# EAGLE board Integration board (EAGLE 9.3.0)
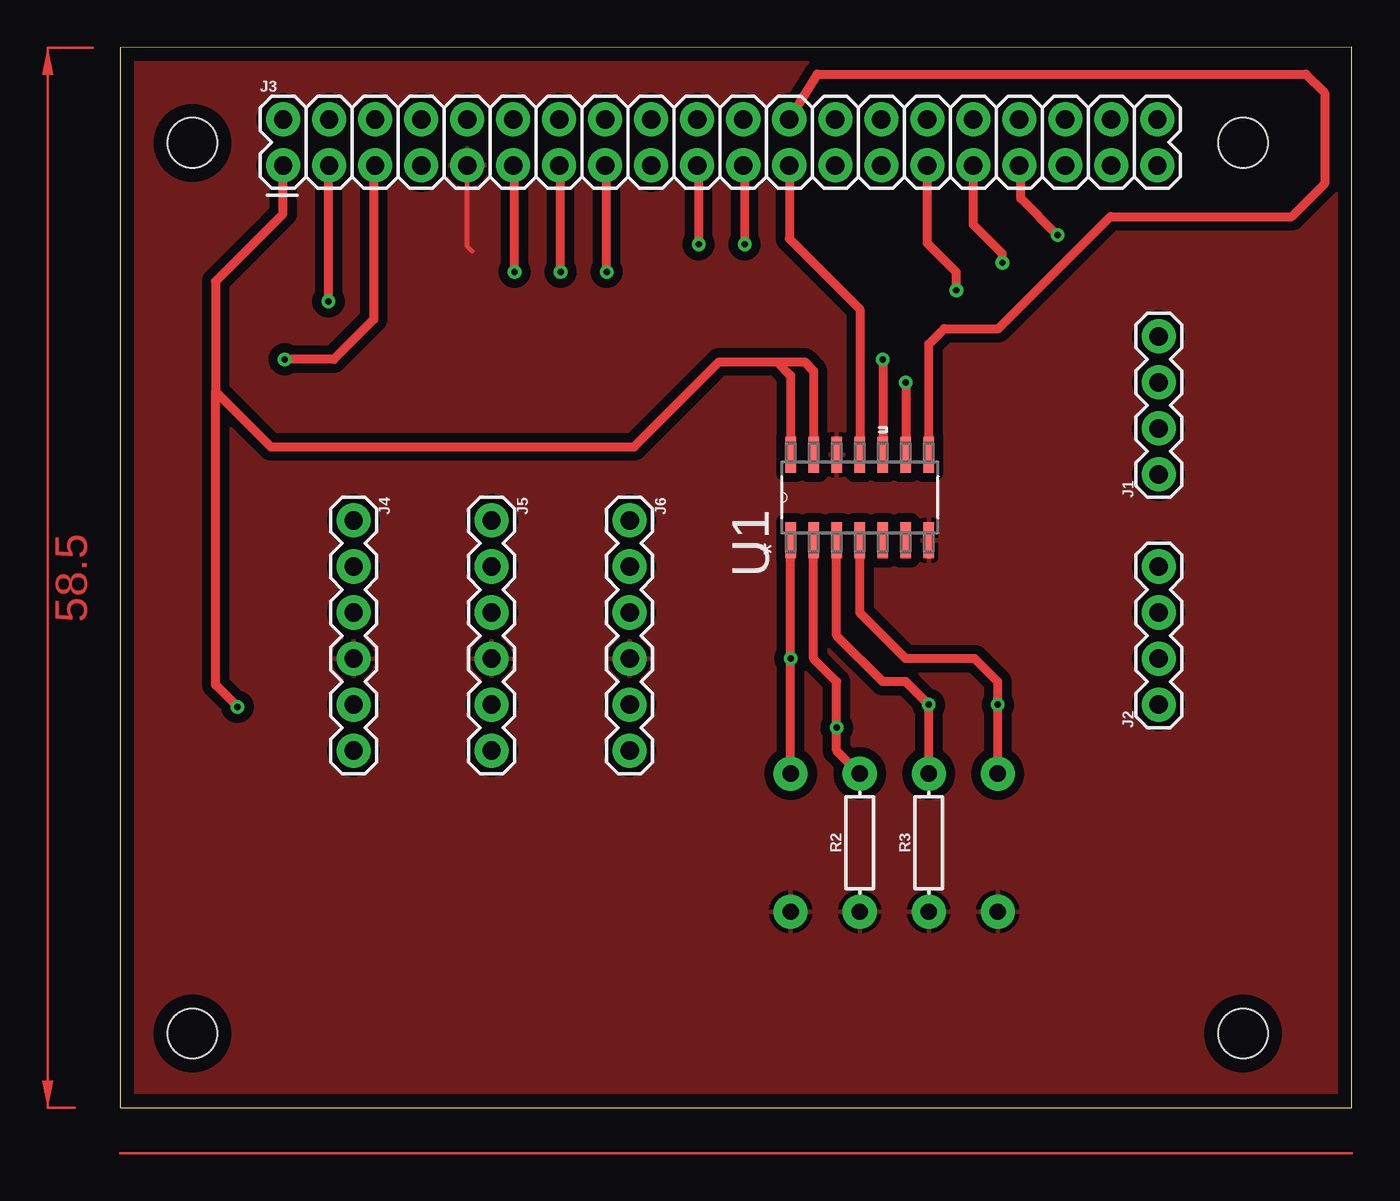
[diagram p0: board, top side]
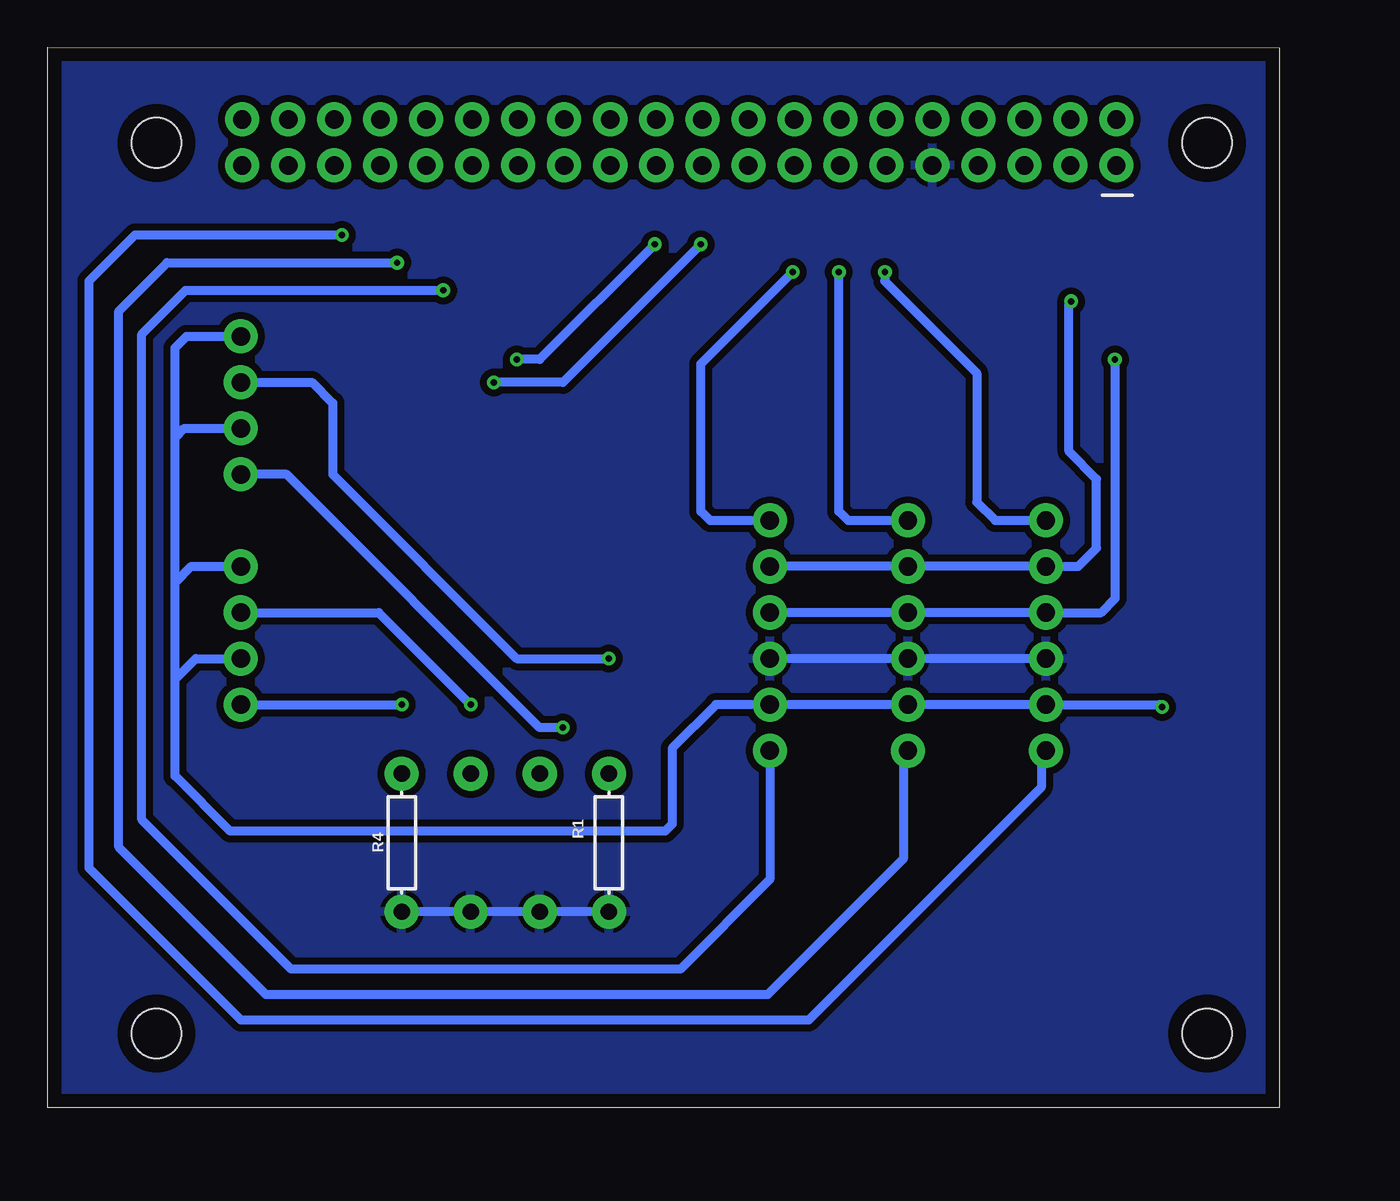
[diagram p1: board, bottom side, seen from below]

Size 68 x 58.52 mm. Coordinates in mm from the lower left corner, seen from the top.
Outline: 0,0 68,0 67.98,58.52 0,58.5 0,0
Copper layers (1*16): Top 0.035mm / dielectric 1.5mm / Bottom 0.035mm
Design rules "default *": minimum track width 10mil, minimum drill 0.35mm, track to track 10mil, track to pad 10mil, pad to pad 10mil, via to via 10mil, smd to smd 10mil, copper to edge 30mil, drill to drill 20mil, minimum pad ring 10mil, minimum via ring 8mil, stop-mask expansion 4mil, vias tented up to drill 0mil, thermal gap 10mil
Holes 2.75 mm at 4,53.25 62,53.25 4,4.1 62,4.1

## Footprints (pad centres in the part's own frame; a part is rotated, then mirrored left to right if it is on the bottom)
1X04 = drill 1.016 pad 1.88: 1 0,0; 2 2.54,0; 3 5.08,0; 4 7.62,0
2X20 = drill 1.016 pad 1.88: 1 0,0; 2 0,2.54; 3 2.54,0; 4 2.54,2.54; 5 5.08,0; 6 5.08,2.54; 7 7.62,0; 8 7.62,2.54; 9 10.16,0; 10 10.16,2.54; 11 12.7,0; 12 12.7,2.54; 13 15.24,0; 14 15.24,2.54; 15 17.78,0; 16 17.78,2.54; 17 20.32,0; 18 20.32,2.54; 19 22.86,0; 20 22.86,2.54; 21 25.4,0; 22 25.4,2.54; 23 27.94,0; 24 27.94,2.54; 25 30.48,0; 26 30.48,2.54; 27 33.02,0; 28 33.02,2.54; 29 35.56,0; 30 35.56,2.54; 31 38.1,0; 32 38.1,2.54; 33 40.64,0; 34 40.64,2.54; 35 43.18,0; 36 43.18,2.54; 37 45.72,0; 38 45.72,2.54; 39 48.26,0; 40 48.26,2.54
1X06 = drill 1.016 pad 1.88: 1 0,0; 2 2.54,0; 3 5.08,0; 4 7.62,0; 5 10.16,0; 6 12.7,0
AXIAL-0.3 = drill 0.9 pad 1.88: P$1 -3.81,0; P$2 3.81,0
SOIC127P600X175-14N = smd 1.981 x 0.559: 1 -2.362,3.81; 2 -2.362,2.54; 3 -2.362,1.27; 4 -2.362,0; 5 -2.362,-1.27; 6 -2.362,-2.54; 7 -2.362,-3.81; 8 2.362,-3.81; 9 2.362,-2.54; 10 2.362,-1.27; 11 2.362,0; 12 2.362,1.27; 13 2.362,2.54; 14 2.362,3.81

## Placement (x,y rotation side)
J1  [1X04]  57.34,34.95 90 top
J2  [1X04]  57.34,22.25 90 top
J3  CONN_20X2  [2X20]  9,52 0 top
J4  [1X06]  12.89,32.41 270 top
J5  [1X06]  20.51,32.41 270 top
J6  [1X06]  28.13,32.41 270 top
R1  [AXIAL-0.3]  37.02,14.63 90 bottom
R2  [AXIAL-0.3]  40.83,14.63 90 top
R3  [AXIAL-0.3]  44.64,14.63 90 top
R4  [AXIAL-0.3]  48.45,14.63 90 bottom
U1  MCP3204-CI/SL  [SOIC127P600X175-14N]  40.83,33.68 90 top

## Library data of the parts
J1 J2 = SparkFun-Connectors; PROD_ID: CONN-09696
J3 = SparkFun-Connectors
J4-J6 = SparkFun-Connectors; PROD_ID: CONN-08437
R1-R4 = SparkFun-Resistors
U1 = MCP3204; MPN: MCP3204-CI/SL; OC_FARNELL: 1196795; OC_NEWARK: 26M1276; PACKAGE: 14 - SOIC; SUPPLIER: Microchip

## Nets
CLK: J3.23 U1.11
CS: J3.24 U1.8
DIN: J3.19 U1.9
DOUT: J3.21 U1.10
GND: J3.9 J4.4 J5.4 J6.4 R1.P$1 R2.P$1 R3.P$1 R4.P$1 U1.7 U1.12
N$1: J1.3 R1.P$2 U1.1
N$2: J3.11 J4.1
N$3: J2.3 R3.P$2 U1.3
N$4: J2.1 R4.P$2 U1.4
N$5: J3.13 J5.1
N$6: J3.29 J6.6
N$7: J3.31 J5.6
N$8: J3.7
N$9: J3.2
N$10: J3.4
N$12: J3.8
N$13: J3.25
N$15: J1.1 R2.P$2 U1.2
N$17: J3.33 J4.6
N$29: J3.15 J6.1
SCL: J3.5 J4.3 J5.3 J6.3
SDA: J3.3 J4.2 J5.2 J6.2
VCC: J1.2 J1.4 J2.2 J2.4 J3.1 J4.5 J5.5 J6.5 U1.13 U1.14

## Tracks (layer width: path | path; a pad name or v marks a point on that pad's centre or on a via)
CLK
  Top 0.508: J3.23 36.94,47.96 40.83,44.07 U1.11
CS
  Top 0.508: J3.24 38.49,57.04 65.46,57.04 66.5,56 66.5,51 64.67,49.17 54.67,49.17 48.5,43 45.5,43 44.64,42.14 U1.8
DIN  (via drill 0.35)
  Top 0.508: v31.94,47.65 31.94,51.79 J3.19 | v43.37,40.03 U1.9
  Bottom 0.508: v31.94,47.65 39.56,40.03 v43.37,40.03
DOUT  (via drill 0.35)
  Top 0.508: v34.48,47.65 34.48,51.79 J3.21 | v42.1,41.3 U1.10
  Bottom 0.508: v34.48,47.65 40.83,41.3 v42.1,41.3
GND
  Top 0.254: J3.9 19.16,47.54 19.43,47.27
  Bottom 0.508: R1.P$1 R2.P$1 R3.P$1 R4.P$1 | J4.4 J5.4 J6.4
  pour Top (isolate 0.508): 0,58.5 68,58.5 68,0 0,0
  pour Bottom (isolate 0.381): 0,58.5 0,0 68,0 68,58.5
N$1  (via drill 0.35)
  Top 0.508: R1.P$2 v37.02,24.79 U1.1
  Bottom 0.508: J1.3 53.4,40.03 52.26,38.88 52.26,34.95 42.1,24.79 v37.02,24.79
N$2  (via drill 0.35)
  Top 0.508: v21.78,46.12 21.78,51.72 J3.11
  Bottom 0.508: v21.78,46.12 21.78,45.62 16.7,40.54 16.7,33.42 15.68,32.41 J4.1
N$3  (via drill 0.35)
  Top 0.508: U1.3 39.56,26.06 42.1,23.52 43.37,23.52 v44.64,22.25 R3.P$2
  Bottom 0.508: v44.64,22.25 49.72,27.33 J2.3
N$4  (via drill 0.35)
  Top 0.508: U1.4 40.83,27.33 43.37,24.79 47.18,24.79 48.45,23.52 v48.45,22.25 R4.P$2
  Bottom 0.508: J2.1 v48.45,22.25
N$5  (via drill 0.35)
  Top 0.508: v24.32,46.12 24.32,51.72 J3.13
  Bottom 0.508: v24.32,46.12 24.32,32.92 23.81,32.41 J5.1
N$6  (via drill 0.35)
  Top 0.508: v46.16,45.11 46.16,46.11 44.56,47.71 J3.29
  Bottom 0.508: J6.6 28.13,12.6 33.08,7.65 54.55,7.65 62.8,15.9 62.8,42.7 60.39,45.11 v46.16,45.11
N$7  (via drill 0.35)
  Top 0.508: v48.7,46.63 48.7,47.13 47.1,48.74 J3.31
  Bottom 0.508: J5.6 20.76,19.45 20.76,13.74 28.26,6.25 55.94,6.25 64.07,14.37 64.07,43.97 61.4,46.63 v48.7,46.63
N$15  (via drill 0.35)
  Top 0.508: R2.P$2 39.56,19.71 v39.56,20.98 39.56,23.52 38.29,24.79 U1.2
  Bottom 0.508: J1.1 54.8,34.95 40.83,20.98 v39.56,20.98
N$17  (via drill 0.35)
  Top 0.508: v51.75,48.16 49.72,50.19 49.72,51.92 J3.33
  Bottom 0.508: J4.6 13.14,19.45 13.14,17.68 25.98,4.84 57.33,4.84 65.72,13.23 65.72,45.62 63.18,48.16 v51.75,48.16
N$29  (via drill 0.35)
  Top 0.508: v26.86,46.12 26.86,51.72 J3.15
  Bottom 0.508: v26.86,46.12 31.94,41.04 31.94,32.92 31.43,32.41 J6.1
SCL  (via drill 0.35)
  Top 0.508: J3.5 14,51.92 14,43.5 11.8,41.3 v9.08,41.3
  Bottom 0.508: v9.08,41.3 9.08,28.09 9.84,27.33 J4.3 J5.3 J6.3
SDA  (via drill 0.35)
  Top 0.508: v11.5,44.5 11.5,51.96 J3.3
  Bottom 0.508: J6.2 J5.2 J4.2 11.11,29.87 10.1,30.88 10.1,34.69 11.62,36.22 11.62,44.38 v11.5,44.5
VCC  (via drill 0.35)
  Top 0.508: J3.1 9,49.34 5.27,45.61 5.27,39.52 | 5.27,39.52 8.32,36.47 28.38,36.47 33.08,41.16 36.26,41.16 | 36.26,41.16 37.02,40.4 U1.14 | 36.26,41.16 37.78,41.16 38.29,40.66 U1.13 | v6.48,22.12 5.27,23.33 5.27,39.52
  Bottom 0.508: 60.96,23.64 60.96,18.31 57.91,15.26 33.91,15.26 33.53,15.64 33.53,19.84 31.11,22.25 J6.5 J5.5 J4.5 6.6,22.25 v6.48,22.12 | 60.96,23.64 59.82,24.79 J2.2 | 60.96,23.64 60.96,28.98 | J2.4 60.07,29.87 60.96,28.98 | 60.96,28.98 60.96,36.98 | J1.2 60.45,37.49 60.96,36.98 | 60.96,36.98 60.96,41.93 60.33,42.57 J1.4
(copper drawn outside any net)
  shapes: Top area x2